# EAGLE board Supply&433Mhz (EAGLE 7.6.0)
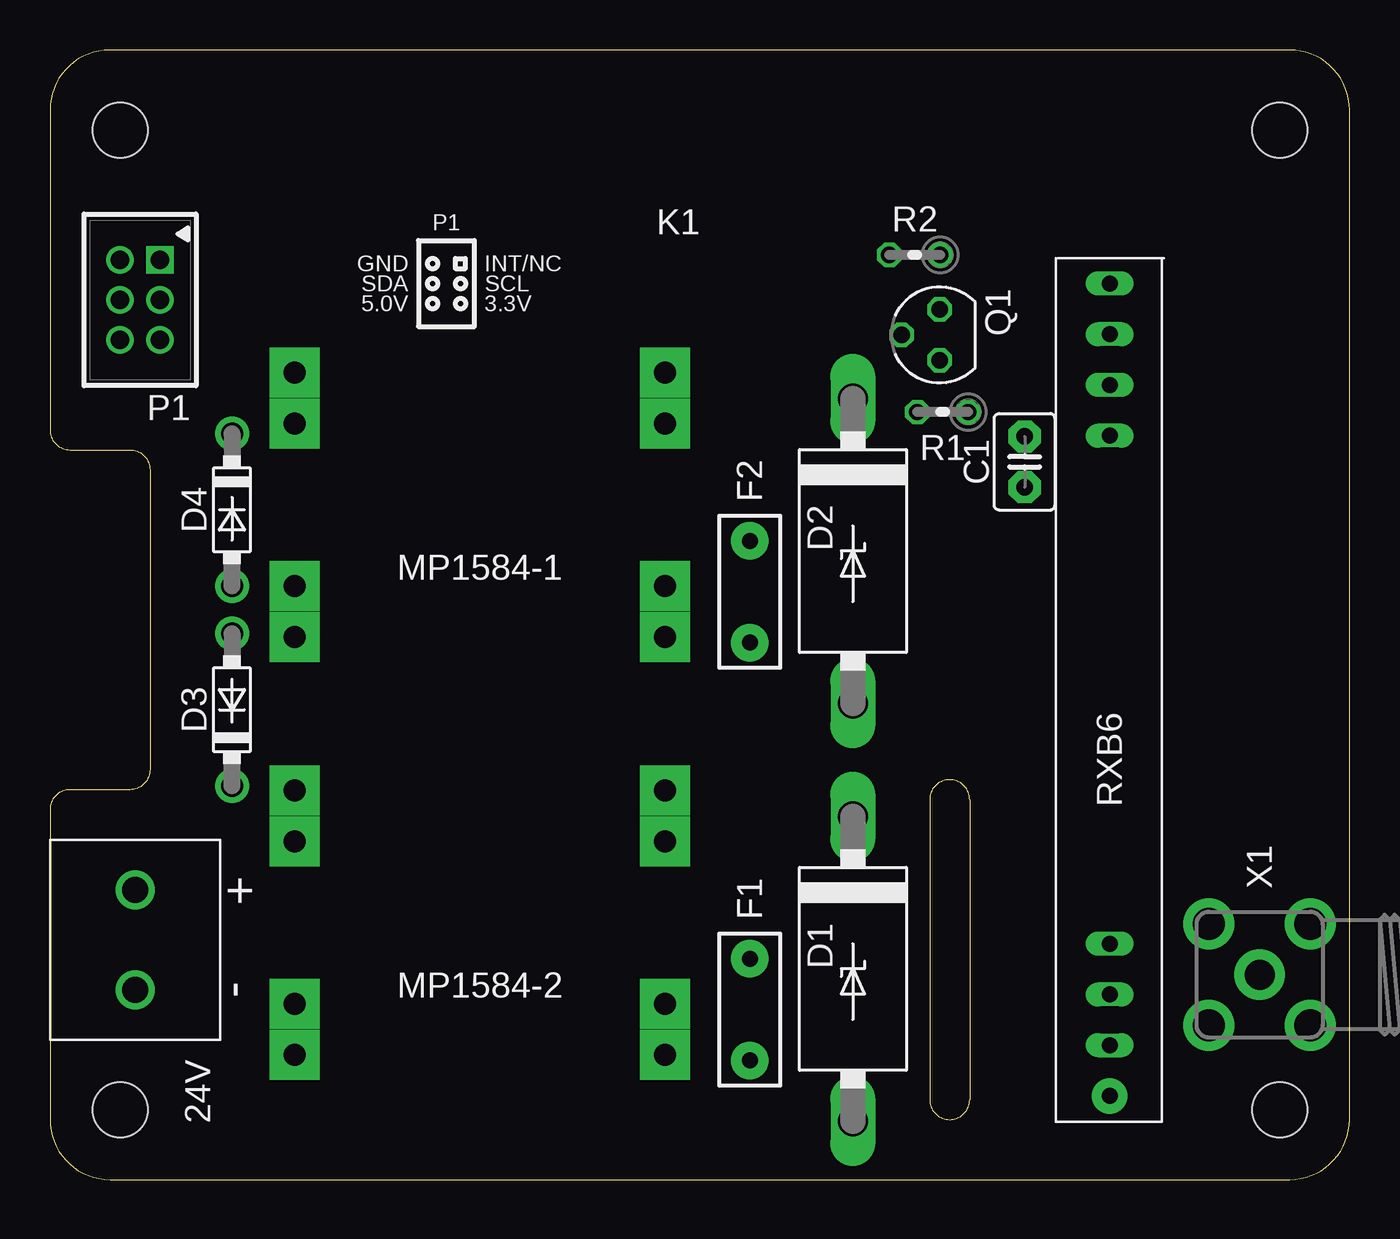
[diagram p0: board, top side]
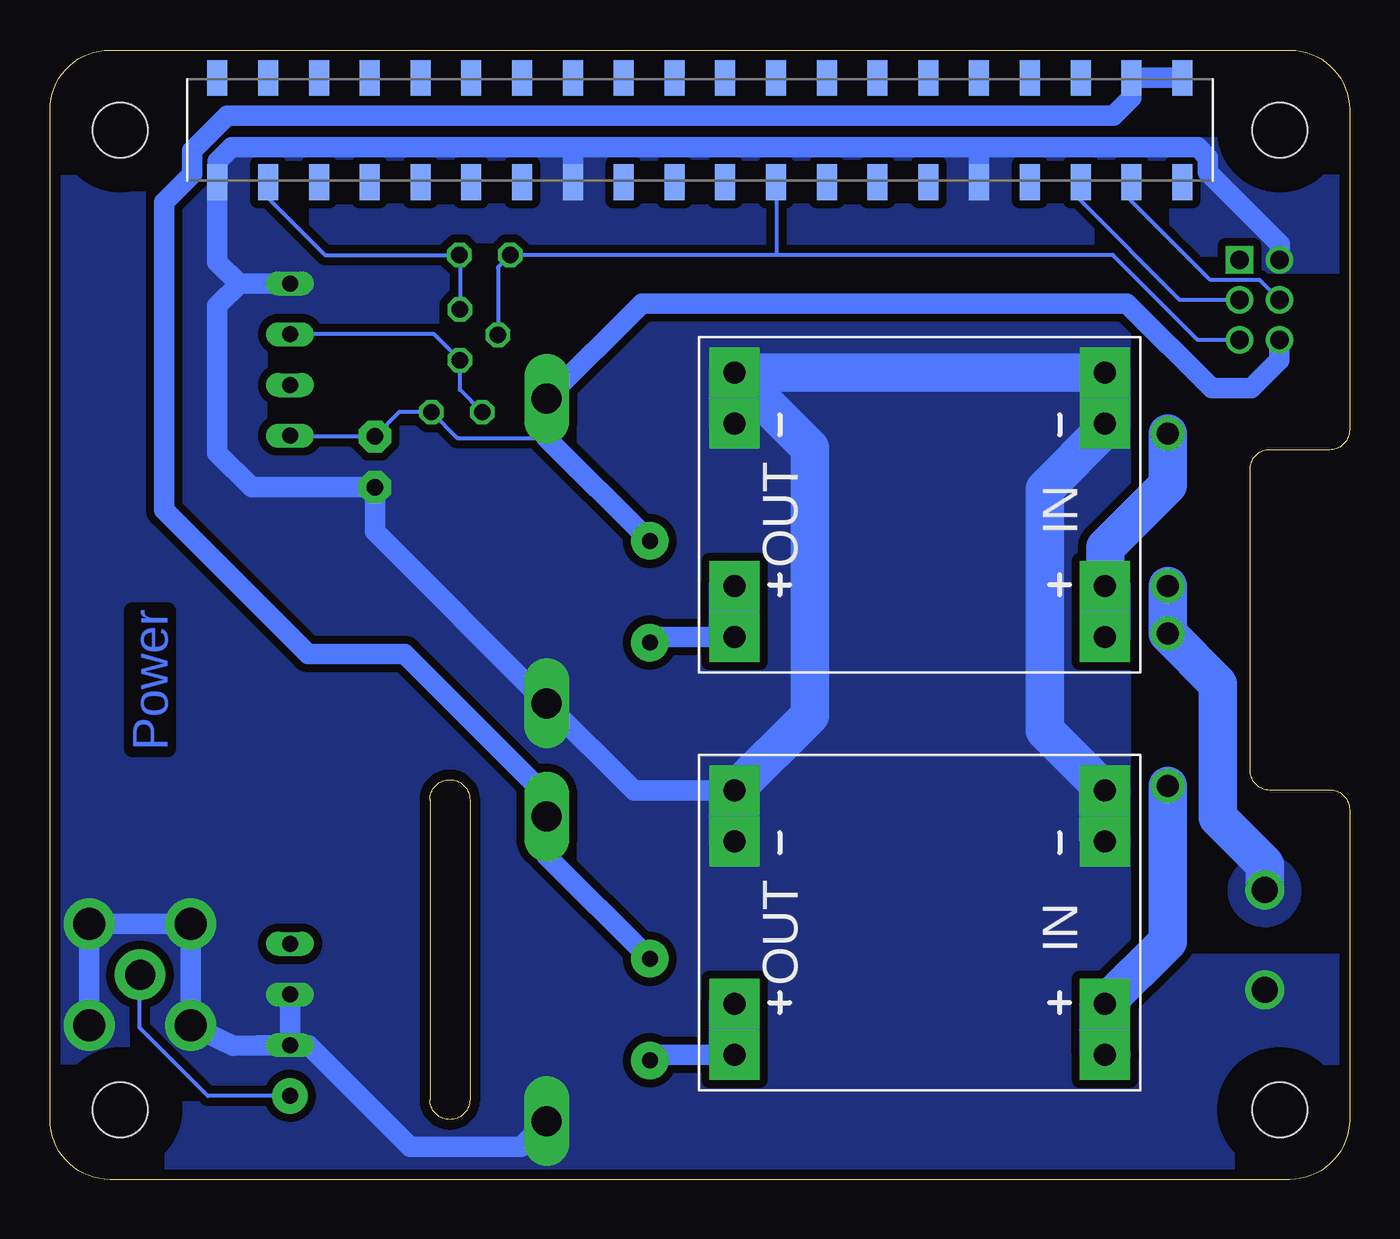
[diagram p1: board, bottom side, seen from below]

Size 65 x 56.5 mm. Coordinates in mm from the lower left corner, seen from the top.
Outline: 3,0 62,0 arc90 65,3 65,53.5 arc90 62,56.5 3,56.5 arc90 0,53.5 0,37.5 arc90 1,36.5 4,36.5 arc-90 5,35.5 5,20.5 arc-90 4,19.5 1,19.5 arc90 0,18.5 0,3 arc90 3,0
Outline: 44,19 44,4 arc90 45,3 arc90 46,4 46,19 arc90 45,20 arc90 44,19
Copper layers (1*16): Top 0.035mm / dielectric 1.6mm / Bottom 0.035mm
Design rules "Elecrow": minimum track width 6mil, minimum drill 12mil, track to track 6mil, track to pad 6mil, pad to pad 6mil, via to via 8mil, smd to smd 0mil, copper to edge 20mil, drill to drill 10mil, minimum pad ring 6mil, minimum via ring 6mil, stop-mask expansion 0mil, vias tented up to drill 100mil, thermal gap 10mil
Net classes: 0 default: clearance 0.205 mm
Holes 2.75 mm at 3.5,3.5 61.5,3.5 61.5,52.5 3.5,52.5
bRestrict: area 58.8,0.8 to 64.2,6.2; area 0.8,49.8 to 6.2,55.2; area 58.8,49.8 to 64.2,55.2; area 0.8,0.8 to 6.2,6.2

## Footprints (pad centres in the part's own frame; a part is rotated, then mirrored left to right if it is on the bottom)
691131710002 = drill 1.3: 1 -2.5,0; 2 2.5,0
C2.5-3 = drill 0.813 pad 1.6 octagon: 1 -1.27,0; 2 1.27,0
C4111-15 = drill 1.499 long: A 7.62,0; C -7.62,0
DO41-7.6 = drill 1.1 pad 1.7: A 3.81,0; C -3.81,0
PTC = drill 0.8 pad 1.88: P$1 -2.54,0; P$2 2.54,0
61004021821 = smd 1 x 1.8: 1 -24.13,2.6; 2 -21.59,2.6; 3 -19.05,2.6; 4 -16.51,2.6; 5 -13.97,2.6; 6 -11.43,2.6; 7 -8.89,2.6; 8 -6.35,2.6; 9 -3.81,2.6; 10 -1.27,2.6; 11 1.27,2.6; 12 3.81,2.6; 13 6.35,2.6; 14 8.89,2.6; 15 11.43,2.6; 16 13.97,2.6; 17 16.51,2.6; 18 19.05,2.6; 19 21.59,2.6; 20 24.13,2.6; 21 24.13,-2.6; 22 21.59,-2.6; 23 19.05,-2.6; 24 16.51,-2.6; 25 13.97,-2.6; 26 11.43,-2.6; 27 8.89,-2.6; 28 6.35,-2.6; 29 3.81,-2.6; 30 1.27,-2.6; 31 -1.27,-2.6; 32 -3.81,-2.6; 33 -6.35,-2.6; 34 -8.89,-2.6; 35 -11.43,-2.6; 36 -13.97,-2.6; 37 -16.51,-2.6; 38 -19.05,-2.6; 39 -21.59,-2.6; 40 -24.13,-2.6
DC-DC-STEP-DOWN-MP1584 = drill 1.1 pad 2.5 square: IN+0 -9.271,4.064; IN+1 -9.271,6.604; IN-0 -9.271,-4.064; IN-1 -9.271,-6.604; OUT+0 9.271,4.064; OUT+1 9.271,6.604; OUT-0 9.271,-4.064; OUT-1 9.271,-6.604
DF11-06DP-2DSA = drill 0.914 square: 1 2,-1 | drill 0.914: 2 2,1; 3 0,-1; 4 0,1; 5 -2,-1; 6 -2,1
SOT54E = drill 0.813 octagon: D -1.27,0; G 0,1.905; S 1.27,0
0204V = drill 0.813 octagon: 1 -1.27,0; 2 1.27,0
WIRELESS-RXB6-5V = drill 0.8 pad 1.778: ANT -20.32,0 | drill 0.8 long: DATA 17.78,0; DE 15.24,0; GND@1 20.32,0; GND@2 -15.24,0; GND@3 -17.78,0; VDD@1 12.7,0; VDD@2 -12.7,0
SMA90_DIP = drill 1.5 pad 2.54: ANTENNA 0,0 | drill 1.6 pad 2.54: GND1 -2.54,2.54; GND2 2.54,2.54; GND3 -2.54,-2.54; GND4 2.54,-2.54

## Placement (x,y rotation side)
24V  691131710002  [691131710002]  4.25,12 90 top
C1  100nF  [C2.5-3]  48.75,35.9 90 top
D1  1N5908  [C4111-15]  40.16,10.54 270 top
D2  1N5908  [C4111-15]  40.16,31.44 270 top
D3  SB1H100  [DO41-7.6]  9.1,23.5 90 top
D4  SB1H100  [DO41-7.6]  9.1,33.5 270 top
F1  PTCPTH  [PTC]  35,8.5 270 top
F2  PTCPTH  [PTC]  35,29.4 90 top
K1  61004021821  [61004021821]  32.5,52.5 180 bottom
MP1584-1  DC-DC-STEP-DOWN-MP1584  [DC-DC-STEP-DOWN-MP1584]  21.5,33.75 180 bottom
MP1584-2  DC-DC-STEP-DOWN-MP1584  [DC-DC-STEP-DOWN-MP1584]  21.5,12.85 180 bottom
P1  DF11-06-2DSA  [DF11-06DP-2DSA]  4.5,44 90 top
Q1  BS170  [SOT54E]  44.5,42.25 90 top
R1  10K  [0204V]  44.65,38.39 180 top
R2  10K  [0204V]  43.25,46.25 180 top
RXB6  WIRELESS-RXB6-5V  [WIRELESS-RXB6-5V]  53,24.5 90 top
X1  [SMA90_DIP]  60.5,10.25 270 top

## Library data of the parts
24V = con-wuerth
C1 = capacitor-wima
D1-D4 = diode
F1 F2 = SparkFun-PowerIC
K1 = Board_to_Board_Connectors_rev15d
MP1584-1 MP1584-2 RXB6 = diy-modules
P1 = con-hirose-df11
Q1 = transistor-small-signal; MF: ON SEMICONDUCTOR; MPN: BS170G; OC_FARNELL: 9556192
R1 R2 = rcl; OC_FARNELL: unknown
X1 = adafruit

## Nets
+24V: 24V.2 D3.A D4.A
GND: 24V.1 C1.1 D1.A D2.A K1.5 K1.13 K1.20 MP1584-1.IN-0 MP1584-1.IN-1 MP1584-1.OUT-0 MP1584-1.OUT-1 MP1584-2.IN-0 MP1584-2.IN-1 MP1584-2.OUT-0 MP1584-2.OUT-1 P1.2 RXB6.GND@1 RXB6.GND@2 RXB6.GND@3 X1.GND1 X1.GND2 X1.GND3 X1.GND4
N$1: K1.3 P1.3
N$2: C1.2 D2.C F2.P$2 P1.6 R1.1 RXB6.VDD@1 RXB6.VDD@2
N$3: Q1.D R1.2 RXB6.DATA
N$4: F1.P$2 MP1584-2.OUT+0 MP1584-2.OUT+1
N$5: D1.C F1.P$1 K1.39 K1.40
N$6: F2.P$1 MP1584-1.OUT+0 MP1584-1.OUT+1
N$7: D3.C MP1584-2.IN+0 MP1584-2.IN+1
N$8: RXB6.ANT X1.ANTENNA
N$9: D4.C MP1584-1.IN+0 MP1584-1.IN+1
N$11: K1.9 P1.5 Q1.G R2.2
N$12: K1.2 P1.4
N$69: K1.19 Q1.S R2.1

## Tracks (layer width: path | path; a pad name or v marks a point on that pad's centre or on a via)
+24V
  Bottom 1.93: 24V.2 4.25,15.77 6.59,18.11 6.59,24.8 D3.A D4.A
  pour Bottom (isolate 0.254, no thermals): 3.15,13.2 arc180 5.35,15.7 arc180
GND
  Bottom 1.016: 18.53,51.63 38.84,51.63 | 38.84,51.63 55.92,51.63 56.61,50.94 56.61,49.92 K1.20 56.63,45.9 55.55,44.82 RXB6.GND@1 55.52,44.82 56.63,43.71 56.63,36.35 54.92,34.64 49.51,34.64 C1.1 48.75,32.41 D2.A 35.79,19.45 MP1584-2.OUT-1 | K1.5 18.53,51.63 | K1.13 38.84,49.93 38.84,51.63 | RXB6.GND@2 RXB6.GND@3 54.57,6.71 | X1.GND2 X1.GND1 X1.GND3 X1.GND4 55.83,6.7 54.57,6.71 | 18.53,51.63 7.6,51.63 7.08,51.11 7.08,50.38 3.5,46.8 P1.2 | D1.A 41.44,1.64 47,1.64 52.07,6.71 54.57,6.71
  Bottom 1.93: 12.17,16.86 MP1584-2.IN-0 | MP1584-1.IN-0 12.23,37.57 15.25,34.55 15.25,22.48 MP1584-2.IN-1 | MP1584-2.OUT-1 27,23.23 27,34.48 27,36.58 MP1584-1.OUT-1 MP1584-1.IN-1
  Bottom 2.54: MP1584-2.OUT-0 MP1584-2.OUT-1 | MP1584-1.OUT-0 30.77,39.13 MP1584-1.OUT-1 | MP1584-1.IN-1 MP1584-1.IN-0 | MP1584-2.IN-0 MP1584-2.IN-1
  pour Bottom (isolate 0.406, no thermals): 11.45,0 11.45,51.63 65,51.63 65,0
  pour Bottom (isolate 0.406, no thermals): 38.85,51.63 38.85,45.81 0,45.81 0,51.63
  pour Bottom (no thermals): 3.15,8.3 arc180 5.35,10.7 arc180
  pour Bottom (isolate 0.406, no thermals): 20,10.79 20,0 0,0 0,10.79
N$1
  Bottom 0.203: P1.3 8.48,44 13.47,48.99 13.47,49.88 K1.3
N$2
  Bottom 0.203: 40.16,37.1 44.63,37.1 R1.1 47.53,38.39 C1.2 52.97,37.17 RXB6.VDD@1
  Bottom 1.016: F2.P$2 40.16,37.1 D2.C 35.4,43.82 11.95,43.82 11.13,43.82 6.9,39.59 4.91,39.59 3.52,40.98 3.52,41.98 P1.6
N$3
  Bottom 0.203: RXB6.DATA 45.8,42.28 Q1.D 44.5,39.51 R1.2
N$4
  Bottom 1.016: F1.P$2 34.71,6.25 MP1584-2.OUT+1
  Bottom 2.54: MP1584-2.OUT+1 MP1584-2.OUT+0
N$5
  Bottom 1.016: K1.40 K1.39 10.91,54.12 11.81,53.22 56.13,53.22 57.88,51.47 57.88,50.3 59.3,48.88 59.3,33.5 52.09,26.29 47.26,26.29 40.16,19.19 D1.C 40.16,16.2 F1.P$1
N$6
  Bottom 1.016: F2.P$1 34.71,27.15 MP1584-1.OUT+1
  Bottom 2.54: MP1584-1.OUT+1 MP1584-1.OUT+0
N$7
  Bottom 1.016: 12.22,6.24 MP1584-2.IN+1
  Bottom 1.93: D3.C 9.1,11.91 MP1584-2.IN+0
  Bottom 2.54: MP1584-2.IN+1 MP1584-2.IN+0
N$8
  Bottom 0.203: RXB6.ANT 57.11,4.18 60.52,7.59 60.52,10.23 X1.ANTENNA
N$9
  Bottom 1.016: 12.22,27.14 MP1584-1.IN+1
  Bottom 1.93: D4.C 9.1,34.73 12.22,31.61 MP1584-1.IN+0
  Bottom 2.54: MP1584-1.IN+0 MP1584-1.IN+1
N$11
  Bottom 0.203: 42.58,42.23 Q1.G 42.59,45.63 R2.2 28.67,46.25 | K1.9 28.8,49.79 28.67,49.79 28.67,46.25 | 28.67,46.25 12.85,46.25 11.83,46.25 7.58,42 P1.5
N$12
  Bottom 0.203: P1.4 4.5,45 6.96,45 10.93,48.97 10.93,49.88 K1.2
N$69
  Bottom 0.203: K1.19 54.09,49.09 51.25,46.25 R2.1 44.5,46.23 Q1.S

## Text on the board
Bottom: Power
tNames: P1 | GND | INT/NC | SDA | SCL | 5.0V | 3.3V | + | -